# Altium PCB PCB1.PcbDoc
Units mil, origin at the board's own origin, x right, y up, seen from the top; angles counter-clockwise.
Board outline 6000 x 4000 mil, 2 copper layers (Top Layer, Bottom Layer); 25 components, 25 nets, 50 pads, 0 vias.
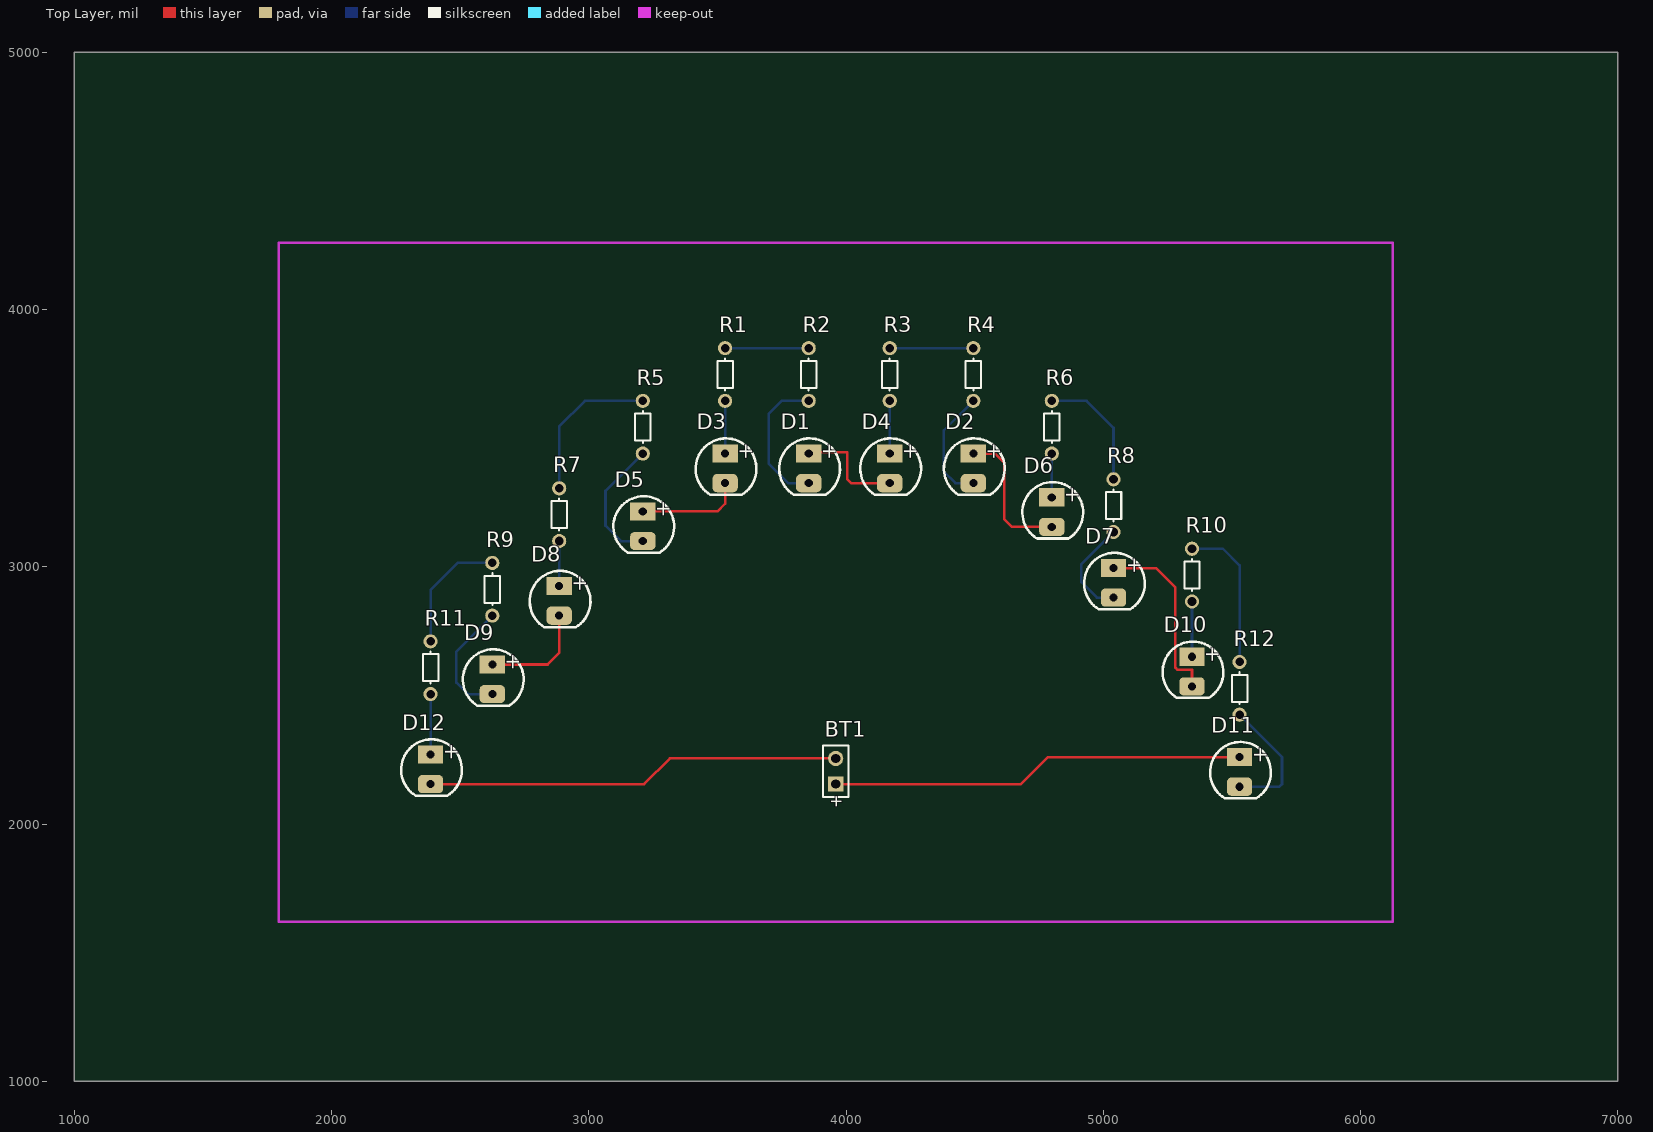
[diagram p0: Top Layer view]
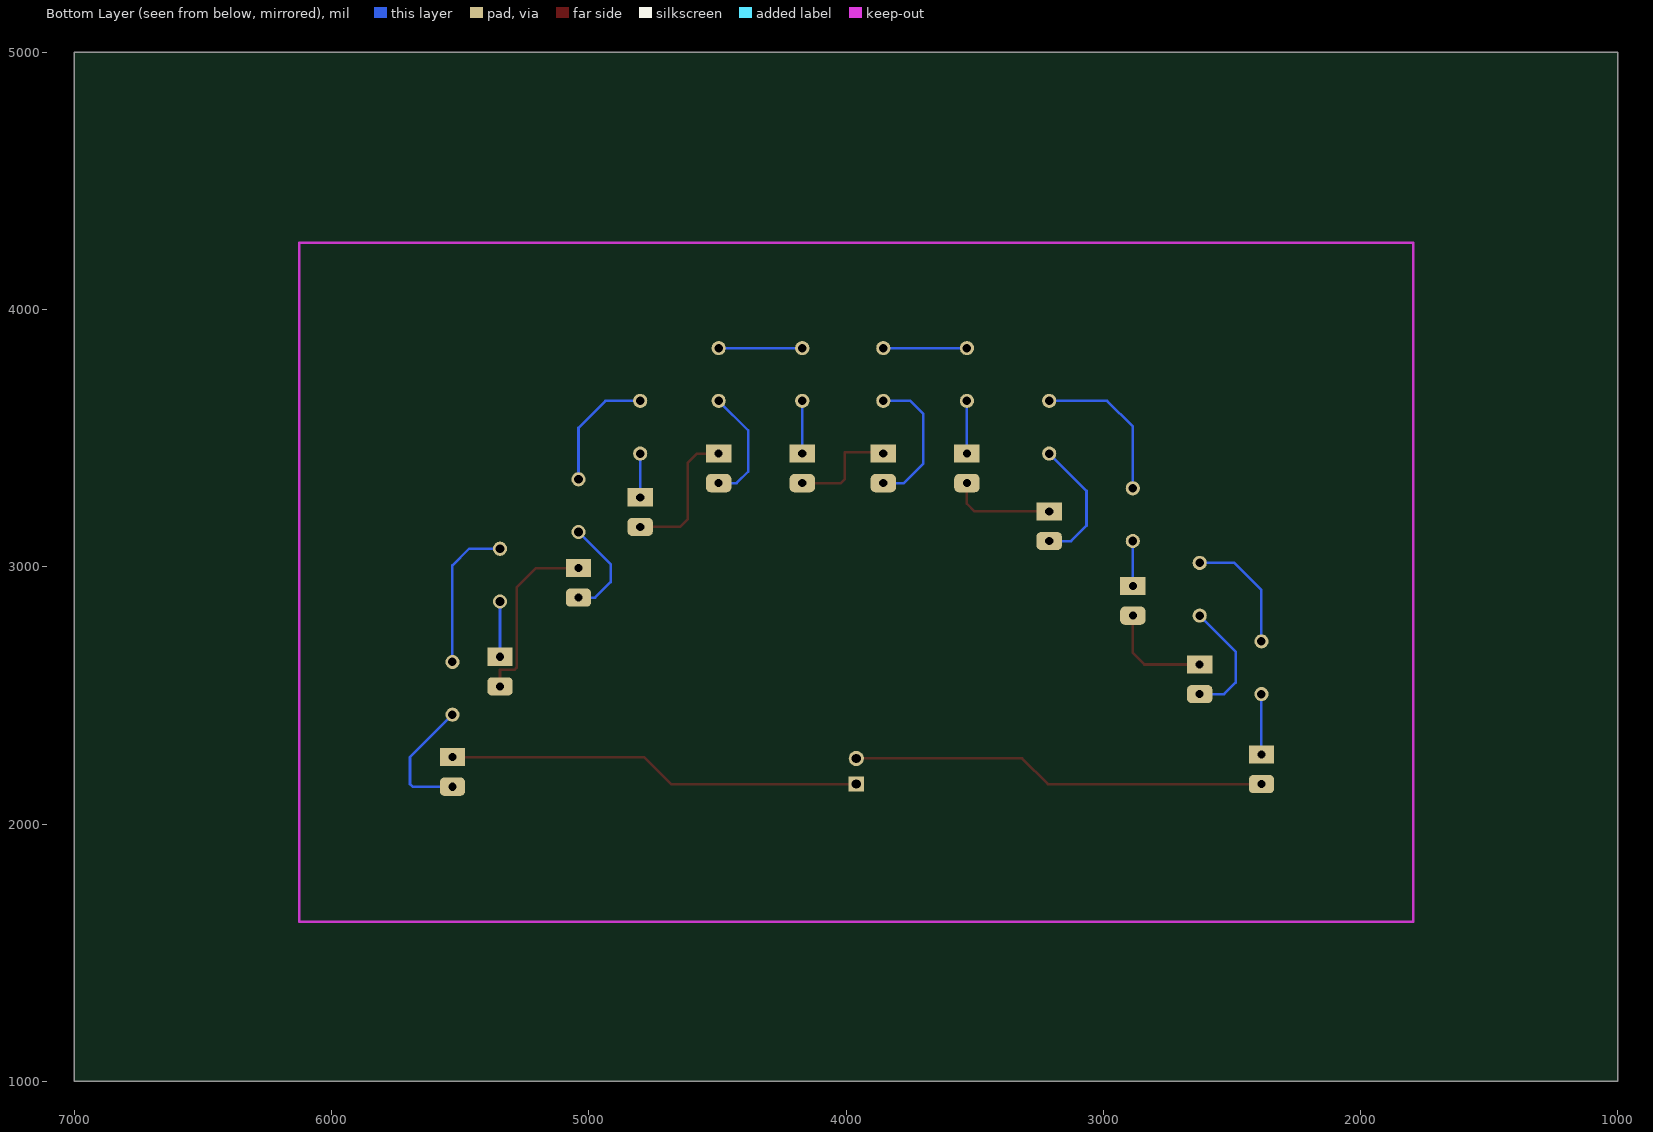
[diagram p1: Bottom Layer view, seen from below]

## Layer stack, top to bottom
Top Solder: solder mask 0.4, Solder Resist, Dk 3.5
Top Layer: signal copper 1.4
Dielectric 1: dielectric 12.6, FR-4, Dk 4.8
Bottom Layer: signal copper 1.4
Bottom Solder: solder mask 0.4, Solder Resist, Dk 3.5

## Board outline
1000,1000 7000,1000 7000,5000 1000,5000

## Design rules (kind name [scope] priority, off if disabled: settings)
Clearance [All] p1: gap=10
PolygonConnect [All] p1: connectstyle=Relief reliefconductorwidth=10 reliefentries=4 polygonreliefangle="90 Angle" airgapwidth=10
RoomDefinition Sheet1 [InComponentClass('Sheet1')] p1: confinementstyle=ConfineIn formatcopy=TRUE lockcomponents=FALSE outline 1935,1785 5985,1785 5985,4050 1935,4050
RoutingVias [All] p1: holewidth=28 width=50 viastyle="Through Hole" minholewidth=28 minwidth=50 maxholewidth=28 maxwidth=50
SolderMaskExpansion [All] p1: expansion=4
Width [All] p1: maxlimit=10 minlimit=10 preferedwidth=10
30 further rules are at their usual default settings.

## Components (designator, comment, footprint, x,y, rotation, side; value= is the part's Value field where it differs from the comment)
BT1 "Battery" BAT-2 3960,2205 r90 top
D1 "LED IR 5mm" LED-1 3855,3385 r0 top
D2 "LED IR 5mm" LED-1 4495,3385 r0 top
D3 "LED IR 5mm" LED-1 3530,3385 r0 top
D4 "LED IR 5mm" LED-1 4170,3385 r0 top
D5 "LED IR 5mm" LED-1 3210,3160 r0 top
D6 "LED IR 5mm" LED-1 4800,3215 r0 top
D7 "LED IR 5mm" LED-1 5040,2940 r0 top
D8 "LED IR 5mm" LED-1 2885,2870 r0 top
D9 "LED IR 5mm" LED-1 2625,2565 r0 top
D10 "LED IR 5mm" LED-1 5345,2595 r0 top
D11 "LED IR 5mm" LED-1 5530,2205 r0 top
D12 "LED IR 5mm" LED-1 2385,2215 r0 top
R1 "Resistor vertical" Res50 3530,3795 r90 top
R2 "Resistor vertical" Res50 3855,3795 r90 top
R3 "Resistor vertical" Res50 4170,3795 r90 top
R4 "Resistor vertical" Res50 4495,3795 r90 top
R5 "Resistor vertical" Res50 3210,3590 r90 top
R6 "Resistor vertical" Res50 4800,3590 r90 top
R7 "Resistor vertical" Res50 2885,3250 r90 top
R8 "Resistor vertical" Res50 5040,3285 r90 top
R9 "Resistor vertical" Res50 2625,2960 r90 top
R10 "Resistor vertical" Res50 5345,3015 r90 top
R11 "Resistor vertical" Res50 2385,2655 r90 top
R12 "Resistor vertical" Res50 5530,2575 r90 top

## Footprints (in the part's own frame and the unit in brackets; to place one, negate y for a bottom-side part, rotate by r counter-clockwise, add the part's x,y. Pads: shape width x height; smd on the part's side, far side on the other; paste and mask are expansions set on the pad)
BAT-2 [mm] "Battery; 2 Leads"
  rect 1.5x1.5 hole 0.9: 1(-1.27,0)
  round 1.5 hole 0.9: 2(1.27,0)
  silkscreen extent -2.54,-1.27 2.54,1.27
LED-1 [mm] "LED; 2 Leads"
  rect 2.5x1.8 hole 0.8: 1(0,1.397)
  rrect50% 2.5x1.8 hole 0.8: 2(0,-1.524)
  silkscreen extent -2.91,-2.67 3.09,2.9
Res50 [mm] "50mm Pin Spacing"
  round 1.4 hole 0.85: 1(-3.81,0) 2(1.397,0)
  silkscreen extent -2.77,-0.76 0.38,0.76

## Part data
BT1: "Multicell Battery"
D1 D2 D3 D4 D5 D6 D7 D8 D9 D10 D11 D12: "Typical LED"
R1 R2 R3 R4 R5 R6 R7 R8 R9 R10 R11 R12: "Resistor 0.5"

## Nets (pads, with @x,y where several pads share a name; then routed paths per layer and width w, separated by ;. In a path a pad name is that pad's centre, name@x,y a point inside that pad or via, vN(x,y) a via of type N, cw(c..) or ccw(c..) an arc to the next point about the centre after c; other vN are vias at no path point)
NetBT1_1: BT1.1 D11.1 | length 1613.5
  Top Layer w10: BT1.1 4680,2155 4785,2260 D11.1
NetBT1_2: BT1.2 D12.2 | length 1616.4
  Top Layer w10: D12.2 3215,2155 3315,2255 BT1.2
NetD1_1: D1.1 D4.2 | length 428.3
  Top Layer w10: D1.1 3860,3445 4005,3445 4005,3340 4020,3325 D4.2
NetD1_2: D1.2 R2.1 | length 556.8
  Bottom Layer w10: D1.2 3775,3325 3700,3400 3700,3595 3750,3645 R2.1
NetD2_1: D2.1 D6.2 | length 551.9
  Top Layer w10: D2.1 4580,3440 4615,3405 4615,3185 4645,3155 D6.2
NetD2_2: D2.2 R4.1 | length 456.3
  Bottom Layer w10: D2.2 4425,3325 4380,3370 4380,3530 R4.1
NetD3_1: D3.1 R1.1 | length 205
  Bottom Layer w10: D3.1 R1.1
NetD3_2: D3.2 D5.1 | length 412.4
  Top Layer w10: D5.1 3500,3215 3530,3245 D3.2
NetD4_1: D4.1 R3.1 | length 205
  Bottom Layer w10: D4.1 R3.1
NetD5_2: D5.2 R5.1 | length 509.9
  Bottom Layer w10: D5.2 3125,3100 3065,3160 3065,3295 R5.1
NetD6_1: D6.1 R6.1 | length 170
  Bottom Layer w10: D6.1 R6.1
NetD7_1: D7.1 D10.2 | length 715.5
  Top Layer w10: D7.1 5205,2995 5280.79,2919.21 5280.79,2608.35 5289.57,2599.57 5345,2599.57 D10.2
NetD7_2: D7.2 R8.1 | length 396.6
  Bottom Layer w10: D7.2 4975,2880 4915,2940 4915,3010 R8.1
NetD8_1: D8.1 R7.1 | length 175
  Bottom Layer w10: D8.1 R7.1
NetD8_2: D8.2 D9.1 | length 423.6
  Top Layer w10: D9.1 2840,2620 2885,2665 D8.2
NetD9_2: D9.2 R9.1 | length 476.6
  Bottom Layer w10: D9.2 2530,2505 2485,2550 2485,2670 R9.1
NetD10_1: D10.1 R10.1 | length 215
  Bottom Layer w10: D10.1 R10.1
NetD11_2: D11.2 R12.1 | length 507.5
  Bottom Layer w10: D11.2 5685,2145 5695,2155 5695,2260 R12.1
NetD12_1: D12.1 R11.1 | length 235
  Bottom Layer w10: D12.1 R11.1
NetR1_2: R1.2 R2.2 | length 325
  Bottom Layer w10: R1.2 R2.2
NetR3_2: R3.2 R4.2 | length 325
  Bottom Layer w10: R3.2 R4.2
NetR5_2: R5.2 R7.2 | length 606.4
  Bottom Layer w10: R7.2 2885,3545 2985,3645 R5.2
NetR6_2: R6.2 R8.2 | length 483.5
  Bottom Layer w10: R6.2 4935,3645 5040,3540 R8.2
NetR9_2: R9.2 R11.2 | length 483.5
  Bottom Layer w10: R11.2 2385,2910 2490,3015 R9.2
NetR10_2: R10.2 R12.2 | length 586.9
  Bottom Layer w10: R10.2 5465,3070 5530,3005 R12.2

## Keep-outs
Keep-Out Layer:
  lines w10: 1795,1620 6125,1620 6125,4260 1795,4260 1795,1620

## Text inside footprints (layer, text, board x,y; h text height)
BT1: Top Overlay "+" at 3982.72,2060.51 h45.28 r90
D1: Top Overlay "+" at 3960,3415 h60 r90
D2: Top Overlay "+" at 4600,3415 h60 r90
D3: Top Overlay "+" at 3635,3415 h60 r90
D4: Top Overlay "+" at 4275,3415 h60 r90
D5: Top Overlay "+" at 3315,3190 h60 r90
D6: Top Overlay "+" at 4905,3245 h60 r90
D7: Top Overlay "+" at 5145,2970 h60 r90
D8: Top Overlay "+" at 2990,2900 h60 r90
D9: Top Overlay "+" at 2730,2595 h60 r90
D10: Top Overlay "+" at 5450,2625 h60 r90
D11: Top Overlay "+" at 5635,2235 h60 r90
D12: Top Overlay "+" at 2490,2245 h60 r90